# EAGLE board OutputControls_v10 (EAGLE 9.7.0)
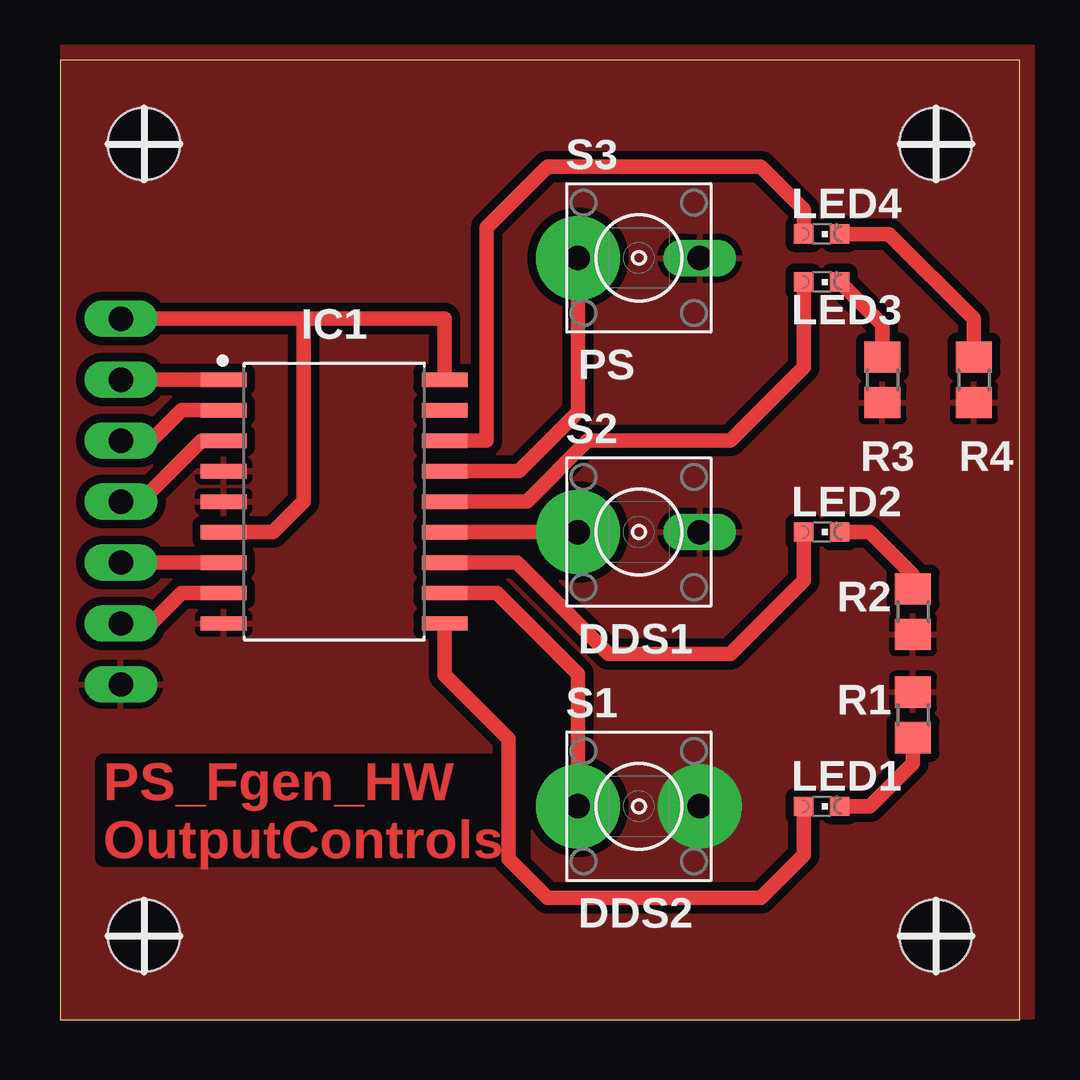
[diagram p0: board, top side]
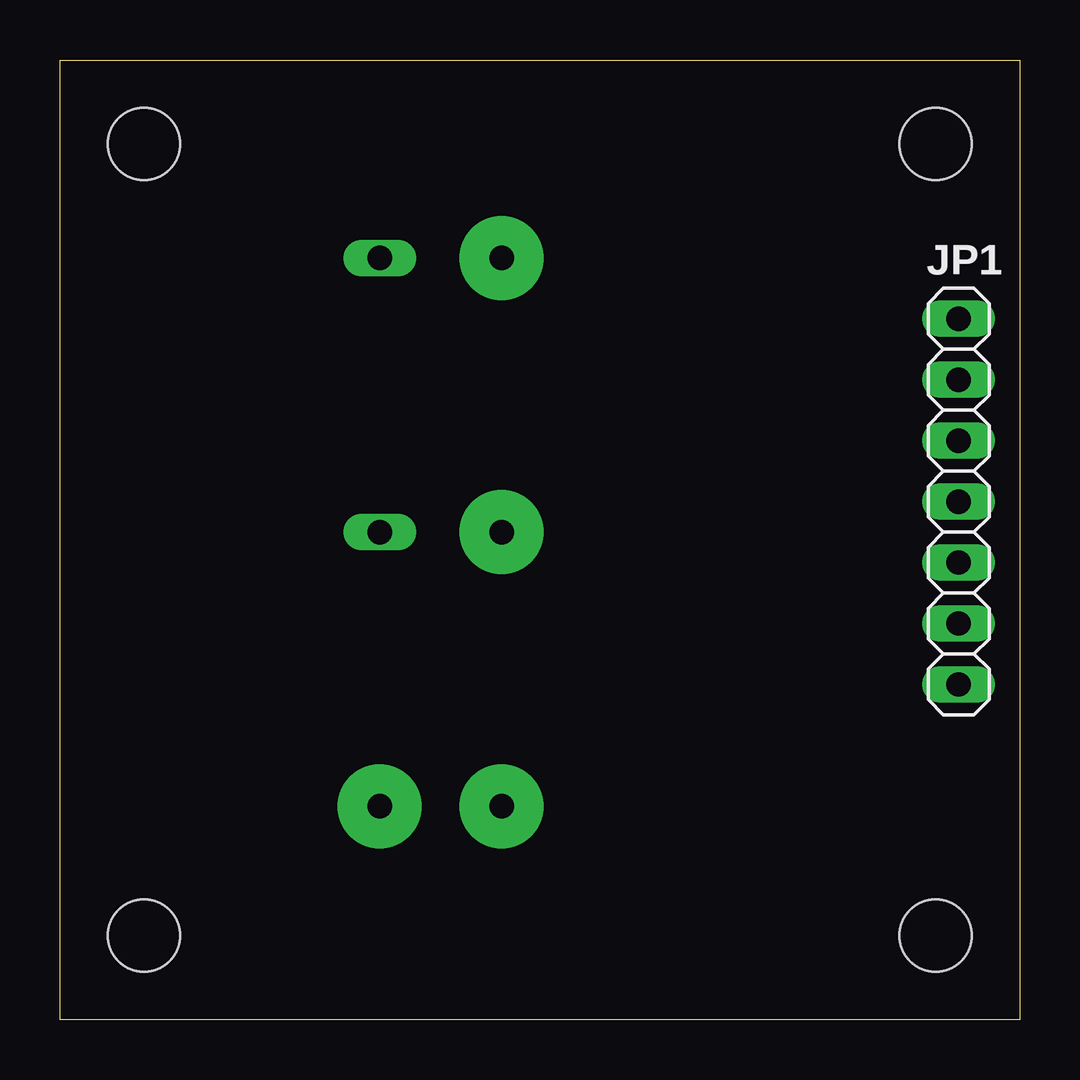
[diagram p1: board, bottom side, seen from below]

Size 40 x 40 mm. Coordinates in mm from the lower left corner, seen from the top.
Outline: 0,0 40,0 40,40 0,40 0,0
Copper layers (1*16): Top 0.035mm / dielectric 1.5mm / Bottom 0.035mm
Design rules "ownDesignRules2.edru": minimum track width 0.4mm, minimum drill 0.35mm, track to track 0.35mm, track to pad 0.35mm, pad to pad 6mil, via to via 6mil, smd to smd 6mil, copper to edge 0mil, drill to drill 6mil, minimum pad ring 10mil, minimum via ring 8mil, stop-mask expansion 4mil, vias tented up to drill 0mil, thermal gap 10mil
Holes 3 mm at 3.5,36.5 3.5,3.5 36.5,3.5 36.5,36.5

## Footprints (pad centres in the part's own frame; a part is rotated, then mirrored left to right if it is on the bottom)
SOIC127P1030X265-18N = smd 1.904 x 0.602: 1 -4.606,5.08; 2 -4.606,3.81; 3 -4.606,2.54; 4 -4.606,1.27; 5 -4.606,0; 6 -4.606,-1.27; 7 -4.606,-2.54; 8 -4.606,-3.81; 9 -4.606,-5.08; 10 4.606,-5.08; 11 4.606,-3.81; 12 4.606,-2.54; 13 4.606,-1.27; 14 4.606,0; 15 4.606,1.27; 16 4.606,2.54; 17 4.606,3.81; 18 4.606,5.08
1X07 = drill 1.016 long: 1 -7.62,0; 2 -5.08,0; 3 -2.54,0; 4 0,0; 5 2.54,0; 6 5.08,0; 7 7.62,0
CHIPLED_0603 = smd 0.8 x 0.8: A 0,-0.75; C 0,0.75
R0805 = smd 1.3 x 1.5: 1 -0.95,0; 2 0.95,0
B3F-10XX = drill 1.016 long: 1 -2.54,0; 2 2.54,0

## Placement (x,y rotation side)
IC1  MCP23008  [SOIC127P1030X265-18N]  11.43,21.59 0 top
JP1  PINHD-1X7  [1X07]  2.54,21.59 270 bottom
LED1  DDS2 (green)  [CHIPLED_0603]  31.75,8.89 270 top
LED2  DDS1 (green)  [CHIPLED_0603]  31.75,20.32 270 top
LED3  PS (green)  [CHIPLED_0603]  31.75,30.75 270 top
LED4  PS ERROR (red)  [CHIPLED_0603]  31.75,32.75 270 top
R1  330  [R0805]  35.56,12.7 90 top
R2  330  [R0805]  35.56,17 270 top
R3  330  [R0805]  34.29,26.67 270 top
R4  330  [R0805]  38.1,26.67 270 top
S1  DDS2  [B3F-10XX]  24.13,8.89 0 top
S2  DDS1  [B3F-10XX]  24.13,20.32 0 top
S3  PS  [B3F-10XX]  24.13,31.75 0 top

## Library data of the parts
IC1 = OwnDevices; CATEGORY: IC_Interface; DESCRIPTION: 8-Bit I/O Expander with Serial Interface; MANUFACTURER: Microchip Technology; MPN: MCP23008-E/SO; OPERATING_TEMP: -40°C to 125°C; PART_STATUS: Active; ROHS_COMPLIANT: COMPLIANT; SUB-CATEGORY: I/O Expander; TYPE: 8 bit
JP1 = Connector; CATEGORY: Headers; DESCRIPTION: Header, Straight, 7 Position; MANUFACTURER: Generic; MPN: Generic; OPERATING_TEMPERATURE: Generic; PART_STATUS: Active; PITCH: 0.100" (2.54mm); ROHS_COMPLIANCE: Generic; SERIES: Generic; SUB-CATEGORY: Headers, Male Pins; TYPE: Board to Board or Cable, Unshrouded, Through Hole, Straight
LED1-LED4 S1-S3 = OwnDevices
R1-R4 = OwnDevices; SPICEPREFIX: R

## Nets
+5V: IC1.6 IC1.18 JP1.1
GND: IC1.4 IC1.5 IC1.9 JP1.7 R1.2 R2.2 R3.2 R4.2 S1.2 S2.2 S3.2
N$1: IC1.10 LED1.A
N$2: IC1.11 S1.1
N$3: IC1.12 LED2.A
N$4: LED1.C R1.1
N$5: LED2.C R2.1
N$6: LED3.C R3.1
N$7: IC1.13 S2.1
N$8: IC1.14 LED3.A
N$9: IC1.15 S3.1
N$10: LED4.C R4.1
N$11: IC1.1 JP1.2
N$12: IC1.2 JP1.3
N$13: IC1.3 JP1.4
N$14: IC1.7 JP1.5
N$15: IC1.8 JP1.6
N$17: IC1.16 LED4.A

## Tracks (layer width: path | path; a pad name or v marks a point on that pad's centre or on a via)
+5V
  Top 0.61: IC1.18 16.04,29.21 15.24,29.21 12.7,29.21 10.16,29.21 | IC1.6 8.89,20.32 10.16,21.59 10.16,29.21 | JP1.1 10.16,29.21
GND  (via drill 1 pad 3.5)
  other vias: 26.67,8.89
  pour Top: 0.08,0.08 40.56,0.08 40.56,40.56 0.08,40.56
N$1
  Top 0.61: LED1.A 31,6.87 29.21,5.08 20.32,5.08 18.7,6.7 18.7,11.7 16.04,14.37 IC1.10
N$2  (via drill 1 pad 3.5)
  Top 0.61: IC1.11 18.21,17.78 21.59,14.4 S1.1
  other vias: 21.59,8.89
N$3
  Top 0.61: IC1.12 19.05,19.05 20.32,17.78 22.86,15.24 26.67,15.24 27.94,15.24 30.48,17.78 31,18.3 LED2.A
N$4
  Top 0.61: R1.1 35.56,10.68 33.77,8.89 LED1.C
N$5
  Top 0.61: R2.1 35.56,18.53 33.77,20.32 LED2.C
N$6
  Top 0.61: LED3.C 34.29,28.96 R3.1
N$7  (via drill 1 pad 3.5)
  Top 0.61: IC1.13 S2.1
  other vias: 21.59,20.32
N$8
  Top 0.61: LED3.A 31,27.19 27.94,24.13 22,24.13 19.46,21.59 IC1.14
N$9  (via drill 1 pad 3.5)
  Top 0.61: IC1.15 19.14,22.86 21.59,25.31 S3.1
  other vias: 21.59,31.75
N$10
  Top 0.61: LED4.C 34.56,32.75 38.1,29.21 R4.1
N$11
  Top 0.61: JP1.2 IC1.1
N$12
  Top 0.61: IC1.2 5.08,25.4 3.81,24.13 JP1.3
N$13
  Top 0.61: JP1.4 3.38,21.59 5.92,24.13 IC1.3
N$14
  Top 0.61: JP1.5 IC1.7
N$15
  Top 0.61: IC1.8 5.08,17.78 3.81,16.51 JP1.6
N$17
  Top 0.61: IC1.16 17.78,24.13 17.78,33.02 20.32,35.56 29.21,35.56 31,33.77 LED4.A

## Text on the board
Top: PS_Fgen_HW / OutputControls
tPlace: PS | DDS1 | DDS2